# Altium PCB Led_Tree_Main .PcbDoc (part 1 of 2)
Units mm, origin at the board's own origin, x right, y up, seen from the top; angles counter-clockwise.
Board outline 150 x 150 mm, 2 copper layers (Top Layer, Bottom Layer); 89 components, 252 nets, 716 pads, 87 vias.
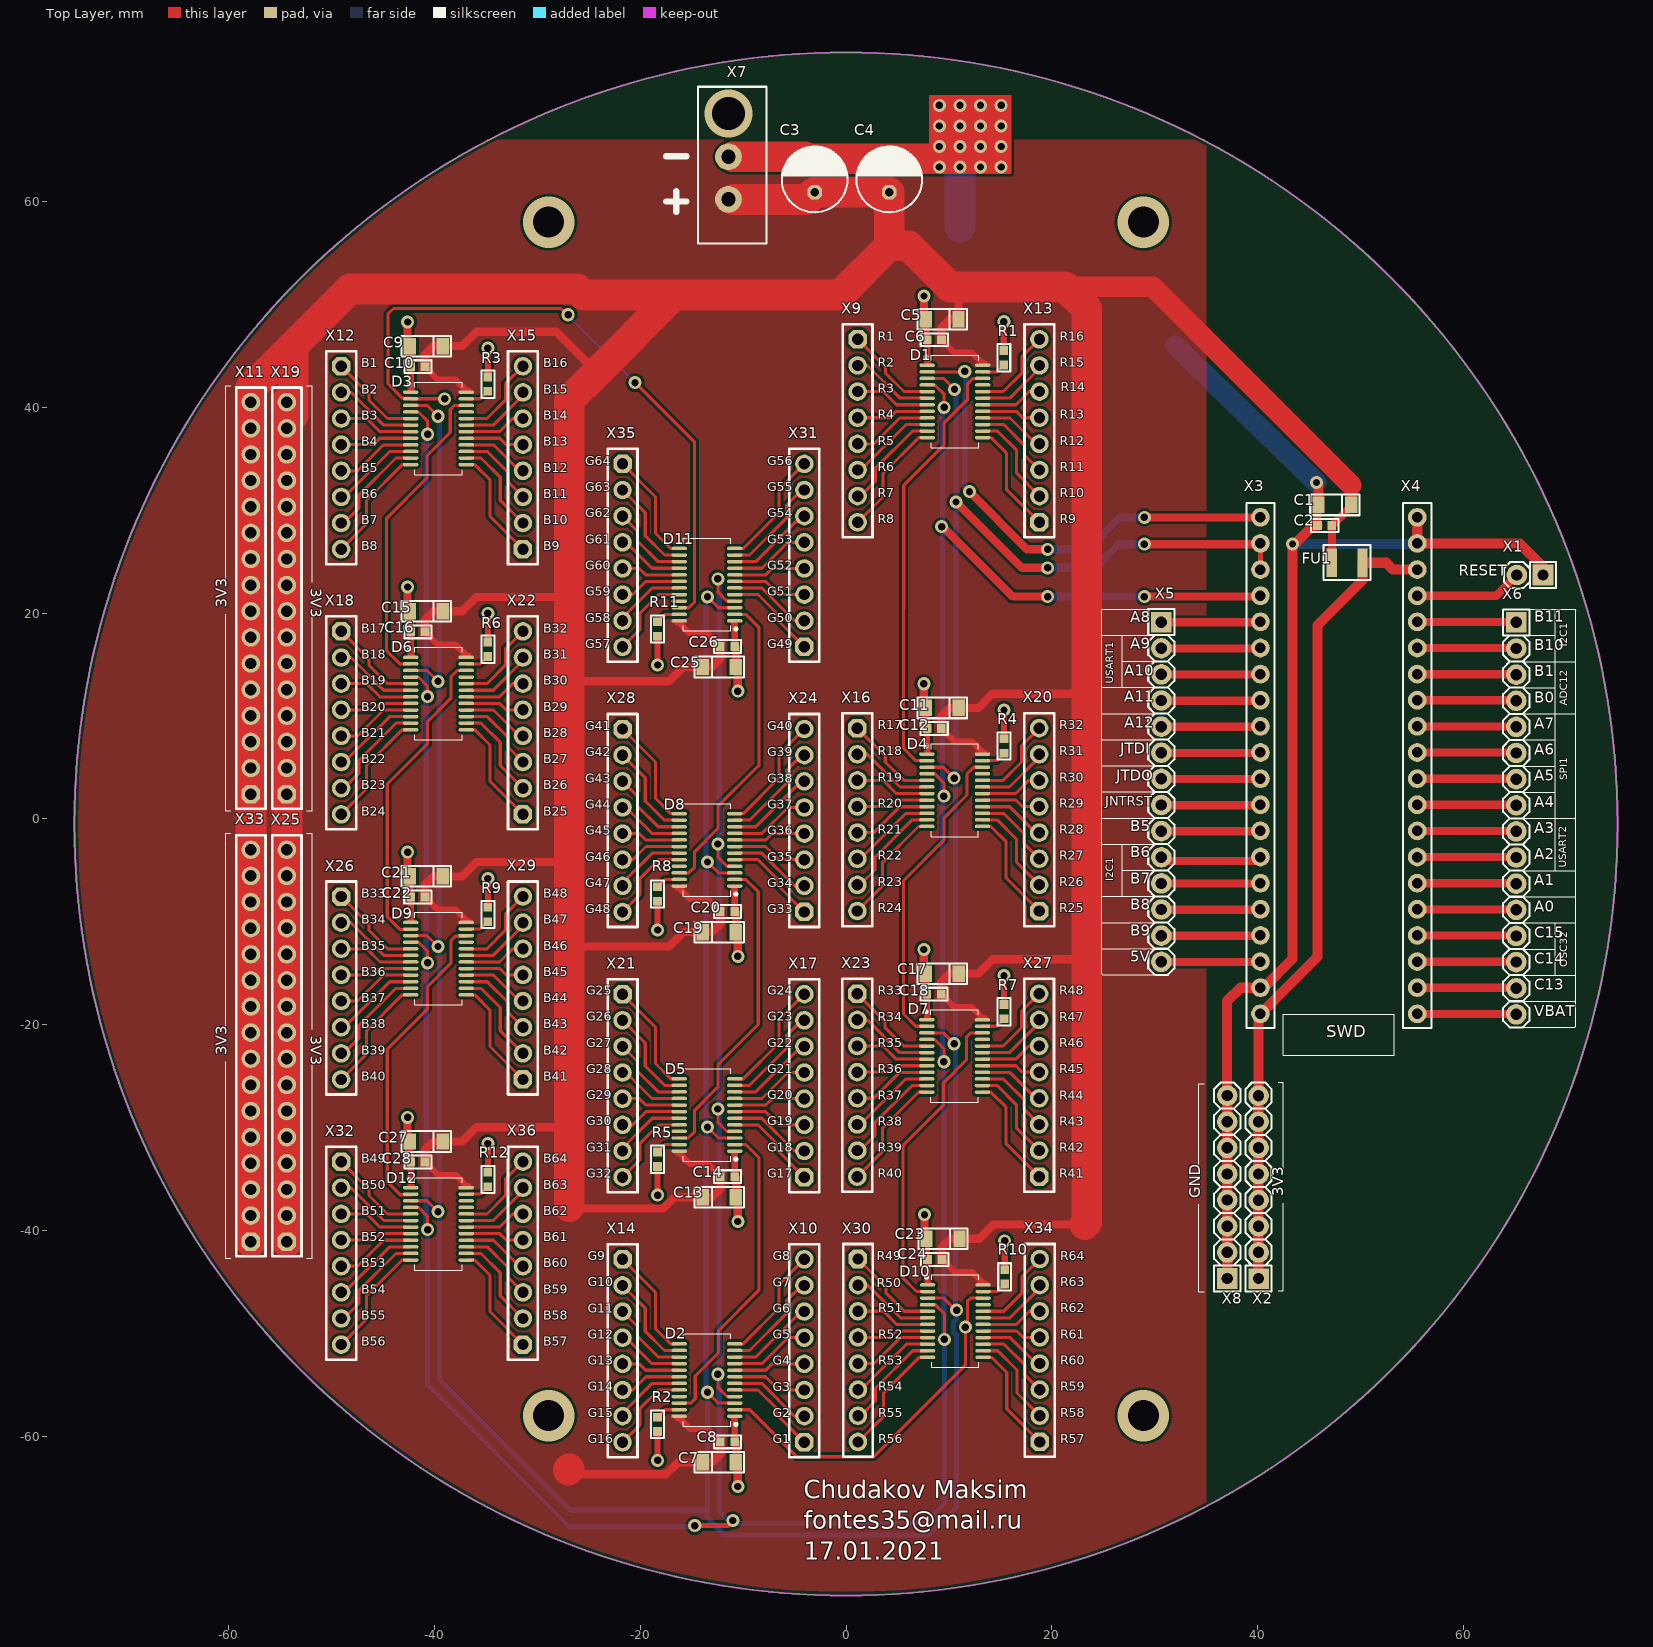
[diagram p0: Top Layer view]
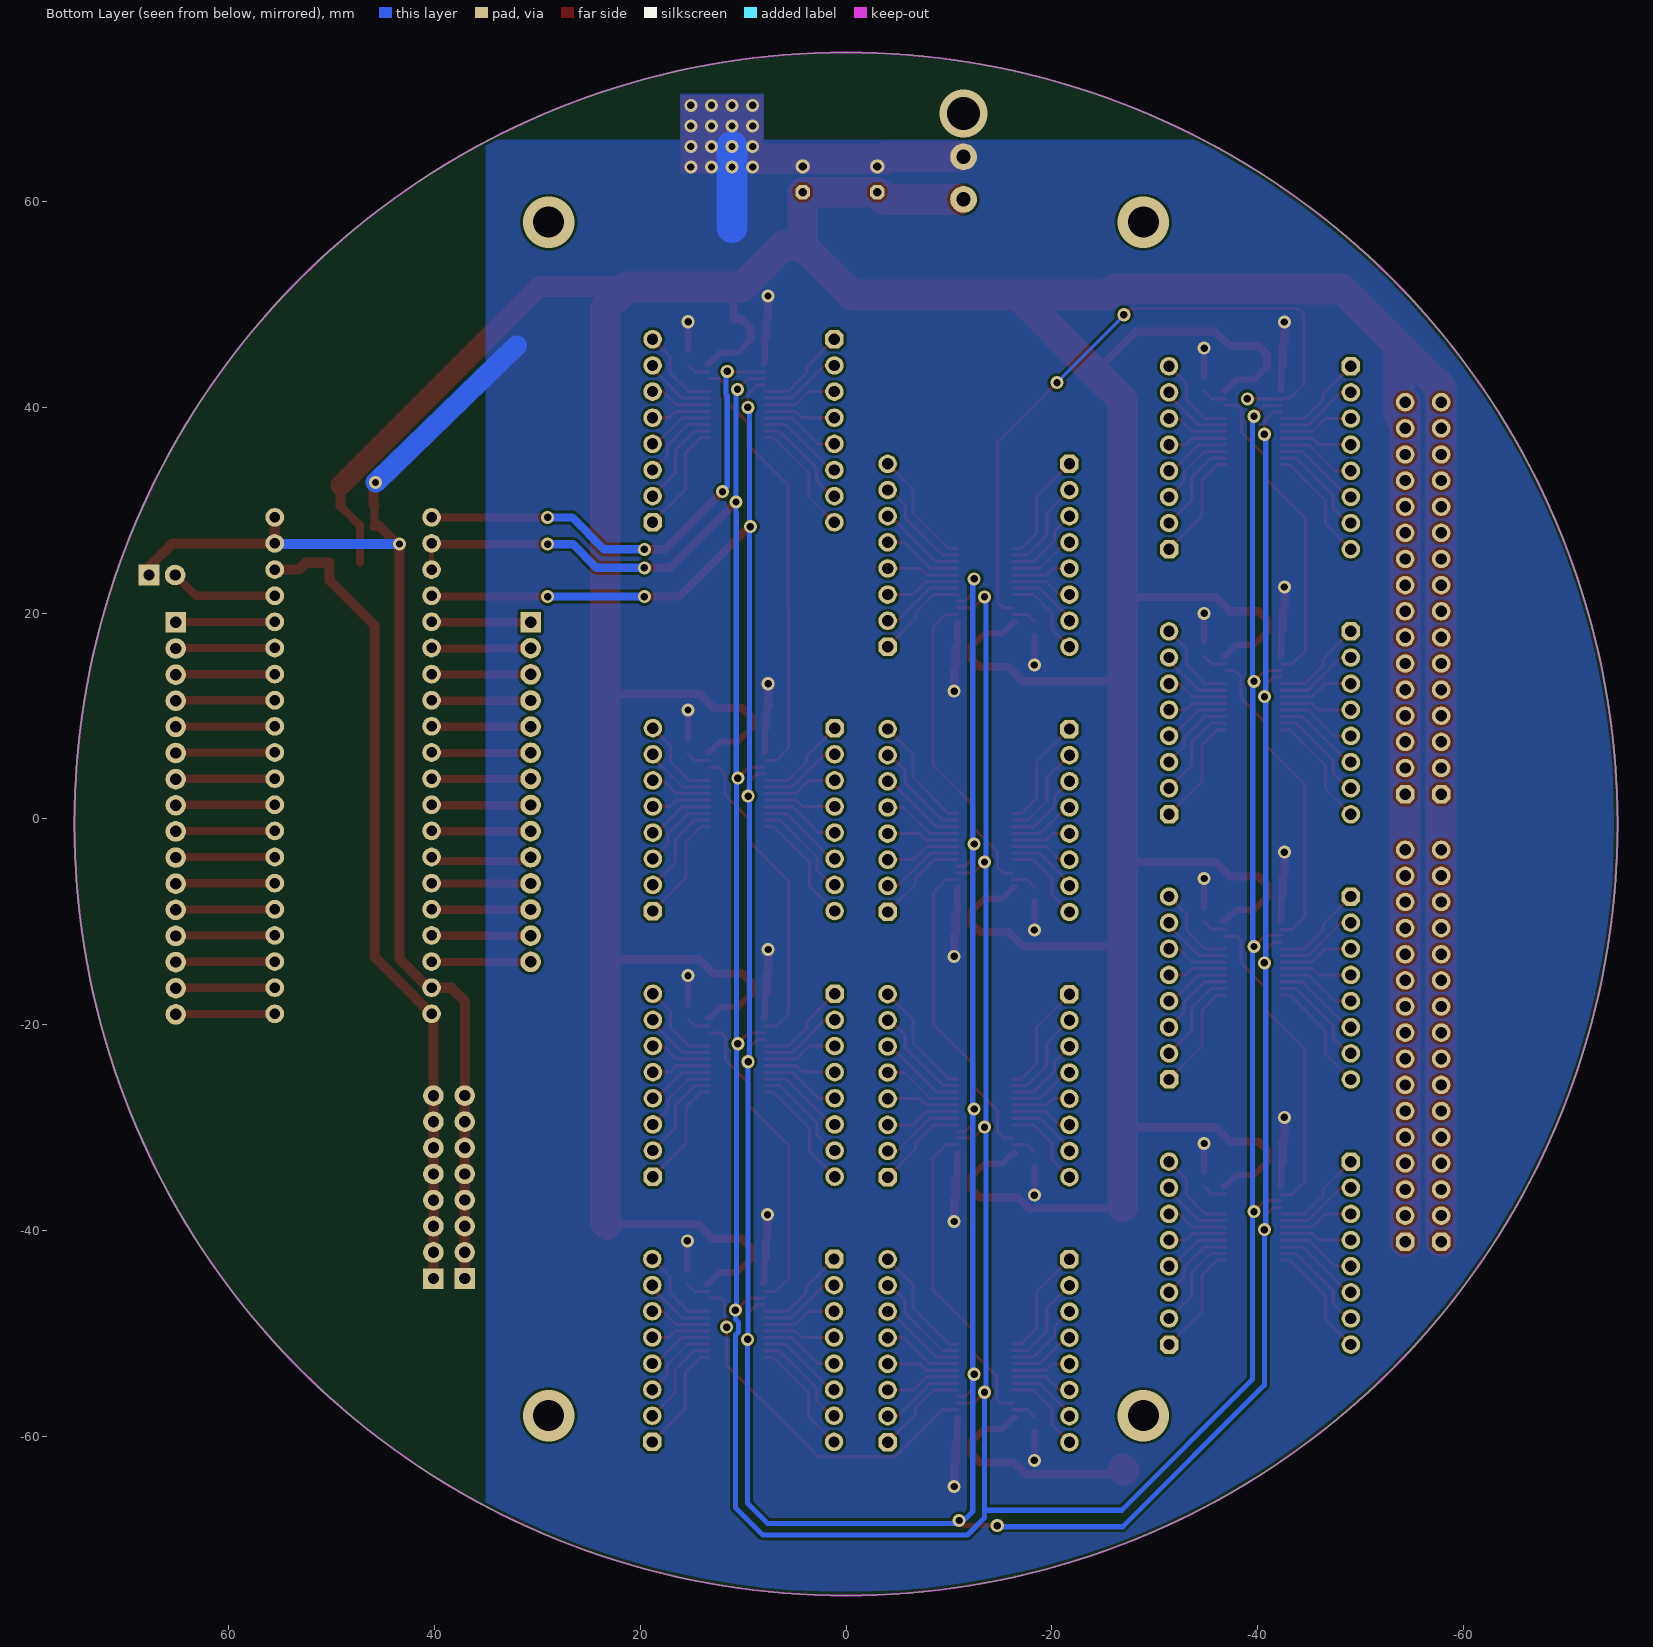
[diagram p1: Bottom Layer view, seen from below]
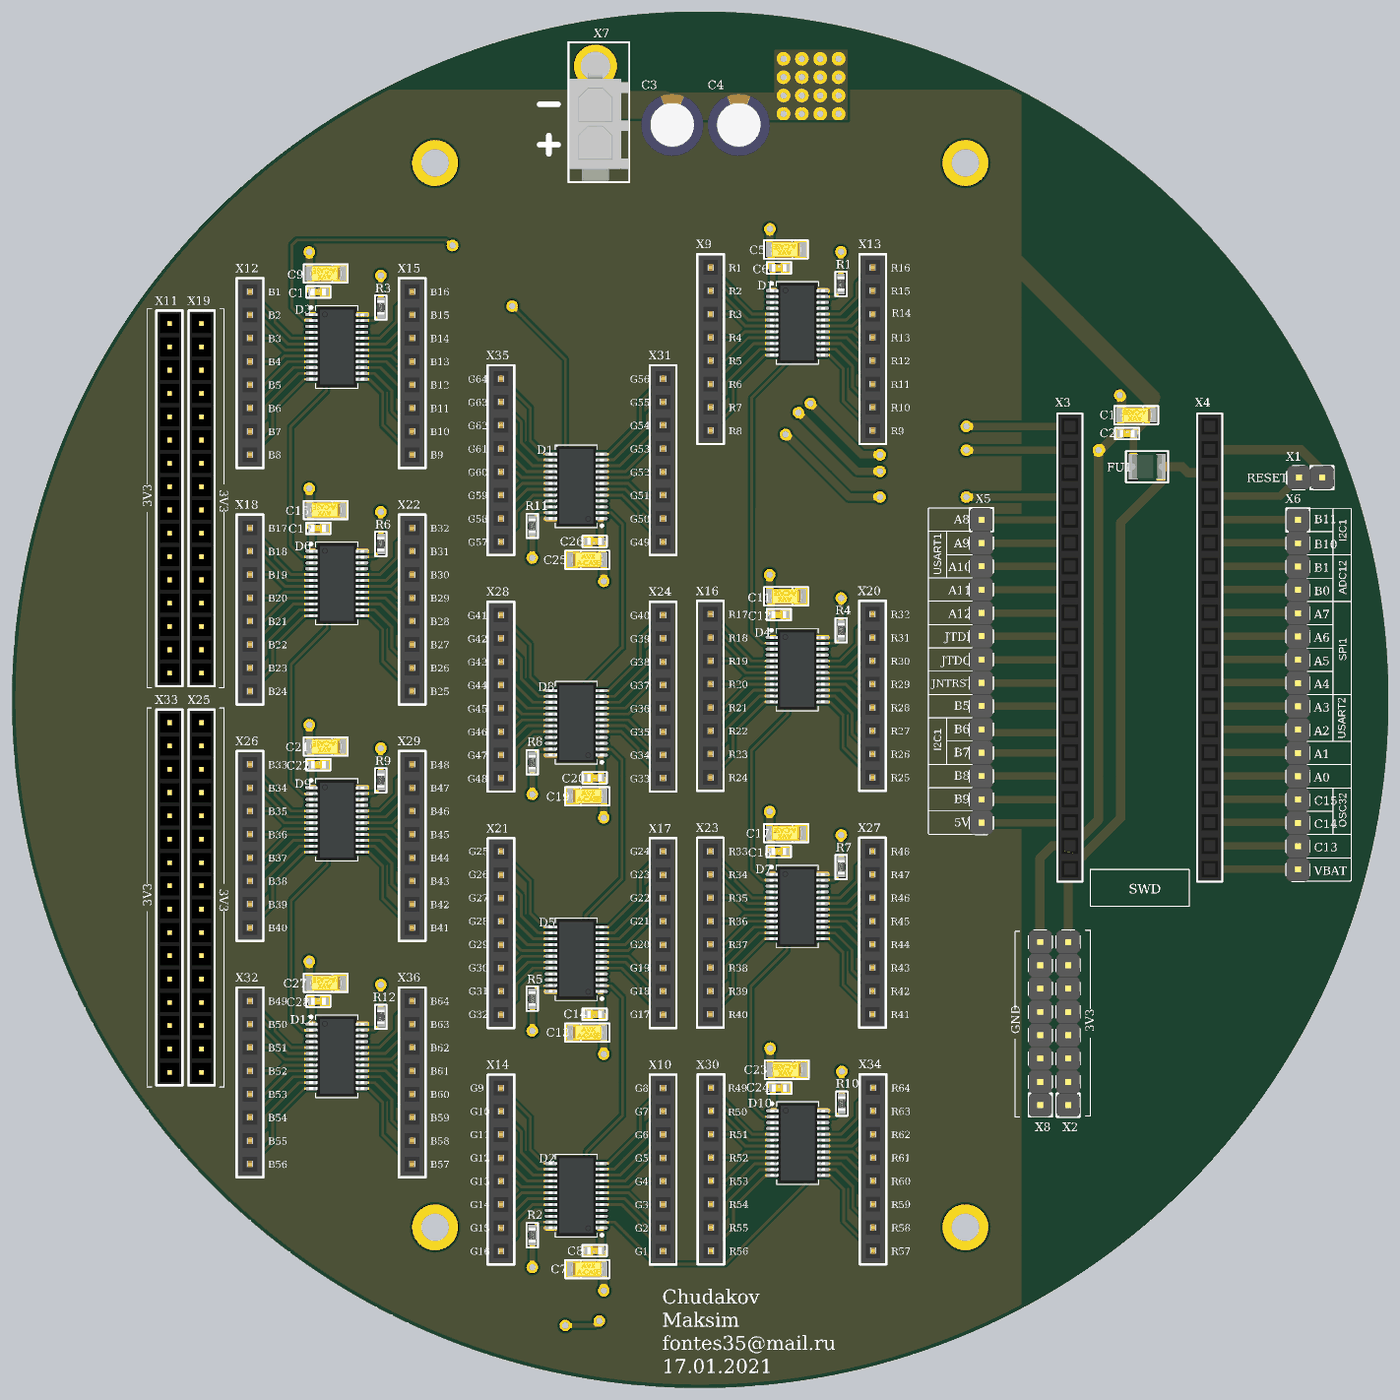
[diagram p3: 3D render of the assembled board from above, using the file's embedded part models]

## Layer stack, top to bottom
Top Solder: solder mask 0.0102, Solder Resist, Dk 3.5
Top Layer: signal copper 0.0356
Dielectric 1: dielectric 0.32, FR-4, Dk 4.8
Bottom Layer: signal copper 0.0356
Bottom Solder: solder mask 0.0102, Solder Resist, Dk 3.5

## Board outline
0,-75.5 cw(c0,-0.5) -75,-0.5 cw(c0,-0.5) 0,74.5 cw(c0,-0.5) 75,-0.5 cw(c0,-0.5)

## Design rules (kind name [scope] priority, off if disabled: settings)
Clearance [All] p1: gap=0.254 ignorepadtopadclearanceinfootprint=FALSE except(0: Arc-Hole Track-Hole SMDPad-Hole THPad-Hole Via-Hole Fill-Hole Poly-Hole Region-Hole Text-Hole)
PolygonConnect [All] p1: connectstyle=Direct reliefconductorwidth=0.8 reliefentries=4 polygonreliefangle="90 Angle" airgapwidth=0.254
RoutingVias [All] p1: holewidth=0.711 width=1.27 viastyle="Through Hole" minholewidth=0.711 minwidth=1.27 maxholewidth=0.711 maxwidth=1.27
SolderMaskExpansion [All] p1: expansion=0.102
Width [All] p1: maxlimit=10 minlimit=0.254 preferedwidth=0.254 minimp=50.000000 maximp=50.000000 favimp=50.000000
30 further rules are at their usual default settings.

## Components (designator, comment, footprint, x,y, rotation, side; value= is the part's Value field where it differs from the comment)
C1 "Tantalum capacitor, 10μF, 16V, ±10%, 3Ohm, case A (3216), -55...+125°C" "CAP: TANTAL-A" 47.525,30.51 r180 top value=10?F
C2 "Ceramic capacitor, 0.1μF, X7R, ±10%, 16V, 0603, -55...+125°C" "CAP: 0603" 46.525,28.51 r0 top value=0.1?F
C3 "Aluminium capacitor, 470μF, 10V, ±20%, , 14x10x5 mm, -40...+105°C" "CAP: D6.3C2.5H11" -3.045,62.16 r90 top value=470?F
C4 "Aluminium capacitor, 470μF, 10V, ±20%, , 14x10x5 mm, -40...+105°C" "CAP: D6.3C2.5H11" 4.205,62.16 r90 top value=470?F
C5 "Tantalum capacitor, 1μF, 35V, ±10%, 7.5Ohm, case A (3216), -55...+125°C" "CAP: TANTAL-A" 9.34,48.57 r180 top value=1?F
C6 "Ceramic capacitor, 0.01μF, X7R, ±10%, 50V, 0603, -55...+125°C" "CAP: 0603" 8.59,46.57 r0 top value=0.01?F
C7 "Tantalum capacitor, 1μF, 35V, ±10%, 7.5Ohm, case A (3216), -55...+125°C" "CAP: TANTAL-A" -12.311,-62.55 r0 top value=1?F
C8 "Ceramic capacitor, 0.01μF, X7R, ±10%, 50V, 0603, -55...+125°C" "CAP: 0603" -11.511,-60.549 r180 top value=0.01?F
C9 "Tantalum capacitor, 1μF, 35V, ±10%, 7.5Ohm, case A (3216), -55...+125°C" "CAP: TANTAL-A" -40.809,45.95 r180 top value=1?F
C10 "Ceramic capacitor, 0.01μF, X7R, ±10%, 50V, 0603, -55...+125°C" "CAP: 0603" -41.609,43.949 r0 top value=0.01?F
C11 "Tantalum capacitor, 1μF, 35V, ±10%, 7.5Ohm, case A (3216), -55...+125°C" "CAP: TANTAL-A" 9.366,10.78 r180 top value=1?F
C12 "Ceramic capacitor, 0.01μF, X7R, ±10%, 50V, 0603, -55...+125°C" "CAP: 0603" 8.566,8.78 r0 top value=0.01?F
C13 "Tantalum capacitor, 1μF, 35V, ±10%, 7.5Ohm, case A (3216), -55...+125°C" "CAP: TANTAL-A" -12.311,-36.78 r0 top value=1?F
C14 "Ceramic capacitor, 0.01μF, X7R, ±10%, 50V, 0603, -55...+125°C" "CAP: 0603" -11.511,-34.779 r180 top value=0.01?F
C15 "Tantalum capacitor, 1μF, 35V, ±10%, 7.5Ohm, case A (3216), -55...+125°C" "CAP: TANTAL-A" -40.809,20.18 r180 top value=1?F
C16 "Ceramic capacitor, 0.01μF, X7R, ±10%, 50V, 0603, -55...+125°C" "CAP: 0603" -41.609,18.179 r0 top value=0.01?F
C17 "Tantalum capacitor, 1μF, 35V, ±10%, 7.5Ohm, case A (3216), -55...+125°C" "CAP: TANTAL-A" 9.361,-15.04 r180 top value=1?F
C18 "Ceramic capacitor, 0.01μF, X7R, ±10%, 50V, 0603, -55...+125°C" "CAP: 0603" 8.56,-17.04 r0 top value=0.01?F
C19 "Tantalum capacitor, 1μF, 35V, ±10%, 7.5Ohm, case A (3216), -55...+125°C" "CAP: TANTAL-A" -12.311,-11.01 r0 top value=1?F
C20 "Ceramic capacitor, 0.01μF, X7R, ±10%, 50V, 0603, -55...+125°C" "CAP: 0603" -11.511,-9.009 r180 top value=0.01?F
C21 "Tantalum capacitor, 1μF, 35V, ±10%, 7.5Ohm, case A (3216), -55...+125°C" "CAP: TANTAL-A" -40.809,-5.59 r180 top value=1?F
C22 "Ceramic capacitor, 0.01μF, X7R, ±10%, 50V, 0603, -55...+125°C" "CAP: 0603" -41.61,-7.589 r0 top value=0.01?F
C23 "Tantalum capacitor, 1μF, 35V, ±10%, 7.5Ohm, case A (3216), -55...+125°C" "CAP: TANTAL-A" 9.426,-40.82 r180 top value=1?F
C24 "Ceramic capacitor, 0.01μF, X7R, ±10%, 50V, 0603, -55...+125°C" "CAP: 0603" 8.625,-42.82 r0 top value=0.01?F
C25 "Tantalum capacitor, 1μF, 35V, ±10%, 7.5Ohm, case A (3216), -55...+125°C" "CAP: TANTAL-A" -12.311,14.76 r0 top value=1?F
C26 "Ceramic capacitor, 0.01μF, X7R, ±10%, 50V, 0603, -55...+125°C" "CAP: 0603" -11.511,16.761 r180 top value=0.01?F
C27 "Tantalum capacitor, 1μF, 35V, ±10%, 7.5Ohm, case A (3216), -55...+125°C" "CAP: TANTAL-A" -40.809,-31.36 r180 top value=1?F
C28 "Ceramic capacitor, 0.01μF, X7R, ±10%, 50V, 0603, -55...+125°C" "CAP: 0603" -41.609,-33.361 r0 top value=0.01?F
D1 "MBI5050GP" MBI5050GP 10.59,40.57 r0 top
D2 "MBI5050GP" MBI5050GP -13.51,-54.55 r180 top
D3 "MBI5050GP" MBI5050GP -39.61,37.95 r0 top
D4 "MBI5050GP" MBI5050GP 10.565,2.78 r0 top
D5 "MBI5050GP" MBI5050GP -13.51,-28.78 r180 top
D6 "MBI5050GP" MBI5050GP -39.61,12.18 r0 top
D7 "MBI5050GP" MBI5050GP 10.56,-23.04 r0 top
D8 "MBI5050GP" MBI5050GP -13.51,-3.01 r180 top
D9 "MBI5050GP" MBI5050GP -39.61,-13.59 r0 top
D10 "MBI5050GP" MBI5050GP 10.625,-48.82 r0 top
D11 "MBI5050GP" MBI5050GP -13.51,22.76 r180 top
D12 "MBI5050GP" MBI5050GP -39.61,-39.36 r0 top
FU1 "200mA" 1210L020WR 48.7,24.9 r0 top (schematic designator FU?)
R1 "Resistor film, 75, ±1%, 0603, 0.1W, -55...+155°C" "RES: 0603" 15.34,44.82 r90 top value=75
R2 "Resistor film, 51, ±1%, 0603, 0.1W, -55...+155°C" "RES: 0603" -18.311,-58.851 r270 top value=51
R3 "Resistor film, 51, ±1%, 0603, 0.1W, -55...+155°C" "RES: 0603" -34.809,42.251 r90 top value=51
R4 "Resistor film, 75, ±1%, 0603, 0.1W, -55...+155°C" "RES: 0603" 15.366,7.081 r90 top value=75
R5 "Resistor film, 75, ±1%, 0603, 0.1W, -55...+155°C" "RES: 0603" -18.311,-33.081 r270 top value=75
R6 "Resistor film, 51, ±1%, 0603, 0.1W, -55...+155°C" "RES: 0603" -34.809,16.481 r90 top value=51
R7 "Resistor film, 75, ±1%, 0603, 0.1W, -55...+155°C" "RES: 0603" 15.361,-18.739 r90 top value=75
R8 "Resistor film, 75, ±1%, 0603, 0.1W, -55...+155°C" "RES: 0603" -18.311,-7.311 r270 top value=75
R9 "Resistor film, 51, ±1%, 0603, 0.1W, -55...+155°C" "RES: 0603" -34.809,-9.289 r90 top value=51
R10 "Resistor film, 75, ±1%, 0603, 0.1W, -55...+155°C" "RES: 0603" 15.426,-44.519 r90 top value=75
R11 "Resistor film, 75, ±1%, 0603, 0.1W, -55...+155°C" "RES: 0603" -18.311,18.459 r270 top value=75
R12 "Resistor film, 51, ±1%, 0603, 0.1W, -55...+155°C" "RES: 0603" -34.809,-35.059 r90 top value=51
X1 "Connector, 2pin, 2.54mm, 500VAC, 3A" "CON: PLS-2" 66.48,23.7 r180 top
X2 "Connector, 8pin, 2.54mm, 500VAC, 3A" "CON: PLS-8" 40.1,-35.79 r90 top
X3 "Connector, 20pin, 2.54mm, 500VAC, 3A" "CON: PBS-20" 40.285,5.18 r270 top
X4 "Connector, 20pin, 2.54mm, 500VAC, 3A" "CON: PBS-20" 55.525,5.18 r270 top
X5 "Connector, 14pin, 2.54mm, 500VAC, 3A" "CON: PLS-14" 30.65,2.615 r270 top
X6 "Connector, 16pin, 2.54mm, 500VAC, 3A" "CON: PLS-16" 65.15,0.05 r270 top
X7 "Connector, 2pin, 4.14mm, 600VAC, 9.5A" "CON: TE 1-770166-0" -11.045,62.91 r90 top
X8 "Connector, 8pin, 2.54mm, 500VAC, 3A" "CON: PLS-8" 37.06,-35.785 r90 top
X9 "Connector, 8pin, 2.54mm, 500VAC, 3A" "CON: PBS-8" 1.13,37.72 r270 top
X10 "Connector, 8pin, 2.54mm, 500VAC, 3A" "CON: PBS-8" -4.05,-51.7 r90 top
X11 "Connector, 16pin, 2.54mm, 500VAC, 3A" "CON: PBS-16" -57.85,21.45 r90 top
X12 "Connector, 8pin, 2.54mm, 500VAC, 3A" "CON: PBS-8" -49.07,35.1 r270 top
X13 "Connector, 8pin, 2.54mm, 500VAC, 3A" "CON: PBS-8" 18.8,37.72 r90 top
X14 "Connector, 8pin, 2.54mm, 500VAC, 3A" "CON: PBS-8" -21.72,-51.7 r270 top
X15 "Connector, 8pin, 2.54mm, 500VAC, 3A" "CON: PBS-8" -31.4,35.1 r90 top
X16 "Connector, 8pin, 2.54mm, 500VAC, 3A" "CON: PBS-8" 1.105,-0.07 r270 top
X17 "Connector, 8pin, 2.54mm, 500VAC, 3A" "CON: PBS-8" -4.05,-25.93 r90 top
X18 "Connector, 8pin, 2.54mm, 500VAC, 3A" "CON: PBS-8" -49.07,9.33 r270 top
X19 "Connector, 16pin, 2.54mm, 500VAC, 3A" "CON: PBS-16" -54.35,21.45 r90 top
X20 "Connector, 8pin, 2.54mm, 500VAC, 3A" "CON: PBS-8" 18.775,-0.07 r90 top
X21 "Connector, 8pin, 2.54mm, 500VAC, 3A" "CON: PBS-8" -21.72,-25.93 r270 top
X22 "Connector, 8pin, 2.54mm, 500VAC, 3A" "CON: PBS-8" -31.4,9.33 r90 top
X23 "Connector, 8pin, 2.54mm, 500VAC, 3A" "CON: PBS-8" 1.1,-25.89 r270 top
X24 "Connector, 8pin, 2.54mm, 500VAC, 3A" "CON: PBS-8" -4.05,-0.16 r90 top
X25 "Connector, 16pin, 2.54mm, 500VAC, 3A" "CON: PBS-16" -54.35,-22.05 r90 top
X26 "Connector, 8pin, 2.54mm, 500VAC, 3A" "CON: PBS-8" -49.07,-16.44 r270 top
X27 "Connector, 8pin, 2.54mm, 500VAC, 3A" "CON: PBS-8" 18.77,-25.89 r90 top
X28 "Connector, 8pin, 2.54mm, 500VAC, 3A" "CON: PBS-8" -21.72,-0.16 r270 top
X29 "Connector, 8pin, 2.54mm, 500VAC, 3A" "CON: PBS-8" -31.4,-16.44 r90 top
X30 "Connector, 8pin, 2.54mm, 500VAC, 3A" "CON: PBS-8" 1.165,-51.67 r270 top
X31 "Connector, 8pin, 2.54mm, 500VAC, 3A" "CON: PBS-8" -4.05,25.61 r90 top
X32 "Connector, 8pin, 2.54mm, 500VAC, 3A" "CON: PBS-8" -49.07,-42.21 r270 top
X33 "Connector, 16pin, 2.54mm, 500VAC, 3A" "CON: PBS-16" -57.85,-22.05 r90 top
X34 "Connector, 8pin, 2.54mm, 500VAC, 3A" "CON: PBS-8" 18.835,-51.67 r90 top
X35 "Connector, 8pin, 2.54mm, 500VAC, 3A" "CON: PBS-8" -21.72,25.61 r270 top
X36 "Connector, 8pin, 2.54mm, 500VAC, 3A" "CON: PBS-8" -31.4,-42.21 r90 top

## Footprints (in the part's own frame and the unit in brackets; to place one, negate y for a bottom-side part, rotate by r counter-clockwise, add the part's x,y. Pads: shape width x height; smd on the part's side, far side on the other; paste and mask are expansions set on the pad)
1210L020WR [mm]
  rect 1x2.8 smd: 1(-1.5,0) 2(1.5,0)
  silkscreen extent -2.3,-1.7 2.3,1.7, body extent -1.61,-1.29 1.61,1.29, height 0.67
"CAP: 0603" [mm]
  rect 0.85x0.85 smd: 1(-0.7,0) 2(0.7,0)
  silkscreen extent -1.33,-0.63 1.33,0.63, body extent -0.8,-0.4 0.8,0.4, height 0.3
"CAP: D6.3C2.5H11" [mm]
  oct 1.4x1.4 hole 0.8: 1(-1.25,0)
  round 1.4 hole 0.8: 2(1.25,0)
  silkscreen extent -3.2,-3.2 3.2,3.2, body extent -3.4,-3.4 3.4,3.4, height 12.5
"CAP: TANTAL-A" [mm]
  rect 1.2x1.6 smd: 1(-1.6,0) 2(1.6,0)
  silkscreen extent -2.4,-1 2.4,1, body extent -1.7,-0.84 1.7,0.84, height 1.71
"CON: PBS-8" [mm] "PBS-8"
  oct 1.8x1.8 hole 1.1: 1(-8.89,0)
  round 1.8 hole 1.1: 2(-6.35,0) 3(-3.81,0) 4(-1.27,0) 5(1.27,0) 6(3.81,0) 7(6.35,0) 8(8.89,0)
  silkscreen extent -10.35,-1.45 10.35,1.45, body extent -10.16,-1.27 10.16,1.27, height 8.4
"CON: PBS-16" [mm] "PBS-16"
  oct 1.8x1.8 hole 1.1: 1(-19.05,0)
  round 1.8 hole 1.1: 2(-16.51,0) 3(-13.97,0) 4(-11.43,0) 5(-8.89,0) 6(-6.35,0) 7(-3.81,0) 8(-1.27,0) 9(1.27,0) 10(3.81,0) 11(6.35,0) 12(8.89,0) 13(11.43,0) 14(13.97,0) 15(16.51,0) 16(19.05,0)
  silkscreen extent -20.48,-1.43 20.48,1.43, body extent -20.32,-1.27 20.32,1.27, height 8.27
"CON: PBS-20" [mm]
  round 1.82 hole 1.02: 1(-24.13,0) 2(-21.59,0) 3(-19.05,0) 4(-16.51,0) 5(-13.97,0) 6(-11.43,0) 7(-8.89,0) 8(-6.35,0) 9(-3.81,0) 10(-1.27,0) 11(1.27,0) 12(3.81,0) 13(6.35,0) 14(8.89,0) 15(11.43,0) 16(13.97,0) 17(16.51,0) 18(19.05,0) 19(21.59,0) 20(24.13,0)
  silkscreen extent -25.5,-1.37 25.5,1.37, body extent -25.4,-1.27 25.4,1.27, height 8.5
"CON: PLS-2" [mm]
  rect 2x2 hole 1.1: 1(-1.27,0)
  round 2 hole 1.1: 2(1.27,0)
  silkscreen extent -2.54,-1.27 2.54,1.27, body extent -2.57,-1.28 2.51,1.26, height 8.54
"CON: PLS-8" [mm] "PLS-40 8 pin header"
  rect 2x2 hole 1.1: 1(-8.89,0)
  round 2 hole 1.1: 2(-6.35,0) 3(-3.81,0) 4(-1.27,0) 5(1.27,0) 6(3.81,0) 7(6.35,0) 8(8.89,0)
  silkscreen extent -10.16,-1.27 10.16,1.27, body extent -10.16,-1.27 10.16,1.27, height 8.54
"CON: PLS-14" [mm]
  rect 2x2 hole 1.1: 1(-16.51,0)
  round 2 hole 1.1: 2(-13.97,0) 3(-11.43,0) 4(-8.89,0) 5(-6.35,0) 6(-3.81,0) 7(-1.27,0) 8(1.27,0) 9(3.81,0) 10(6.35,0) 11(8.89,0) 12(11.43,0) 13(13.97,0) 14(16.51,0)
  silkscreen extent -17.78,-1.27 17.78,1.27, body extent -17.78,-1.27 17.78,1.27, height 8.54
"CON: PLS-16" [mm]
  rect 2x2 hole 1.1: 1(-19.05,0)
  round 2 hole 1.1: 2(-16.51,0) 3(-13.97,0) 4(-11.43,0) 5(-8.89,0) 6(-6.35,0) 7(-3.81,0) 8(-1.27,0) 9(1.27,0) 10(3.81,0) 11(6.35,0) 12(8.89,0) 13(11.43,0) 14(13.97,0) 15(16.51,0) 16(19.05,0)
  silkscreen extent -20.32,-1.27 20.32,1.27, body extent -20.32,-1.27 20.32,1.27, height 8.54
"CON: TE 1-770166-0" [mm]
  round 2.6 hole 1.4: 1(-2.7,0.38) 2(1.44,0.38)
  silkscreen extent -7,-3.32 8.25,3.32, body extent -6.85,-3.18 6.84,3.17, height 14.25
MBI5050GP [mm]
  oval 1.5x0.34 smd: 1(-2.7,3.52) 2(-2.7,2.88) 3(-2.7,2.24) 4(-2.7,1.6) 5(-2.7,0.96) 6(-2.7,0.32) 7(-2.7,-0.32) 8(-2.7,-0.96) 9(-2.7,-1.6) 10(-2.7,-2.24) 11(-2.7,-2.88) 12(-2.7,-3.52) 13(2.7,-3.52) 14(2.7,-2.88) 15(2.7,-2.24) 16(2.7,-1.6) 17(2.7,-0.96) 18(2.7,-0.32) 19(2.7,0.32) 20(2.7,0.96) 21(2.7,1.6) 22(2.7,2.24) 23(2.7,2.88) 24(2.7,3.52)
  silkscreen extent -2.92,-4.5 2.3,4.5, body extent -3,-4.35 3,4.35, height 1.7
"RES: 0603" [mm]
  rect 0.85x0.85 smd: 1(-0.7,0) 2(0.7,0)
  silkscreen extent -1.33,-0.63 1.33,0.63, body extent -0.8,-0.4 0.8,0.4, height 0.44

## Part data
C1: library part Tantal_A, Manufacturer=AVX, Package="case A (3216)", PartNumber=TAJA106K016RNJ, Temperature=-55...+125°C, Tolerance=±10%, TypeCapacitor="Tantalum capacitor", ValueManufacturerPartNumber="Tantalum capacitor, 10?F, 16V, ±10%, 3Ohm, case A (3216), -55...+125°C", Voltage=16V, HelpURL=https://www.digikey.com/product-detail/en/avx-corporation/TAJA106K016RNJ/478-1655-1-ND/564687, Impedance=3Ohm
C2: library part Ceramic_0603, Manufacturer="Murata Electronics", Package=0603, PartNumber=GRM188R71C104KA01D, Temperature=-55...+125°C, Tolerance=±10%, TypeCapacitor="Ceramic capacitor", TypeDielectric=X7R, ValueManufacturerPartNumber="Ceramic capacitor, 0.1?F, X7R, ±10%, 16V, 0603, -55...+125°C", Voltage=16V, HelpURL=https://www.digikey.com/product-detail/en/murata-electronics/GRM188R71C104KA01D/490-1532-2-ND/587060
C3 C4: library part Aluminium, Manufacturer=JB, Package="14x10x5 mm", PartNumber=JRB1A471M02500630120000B, Temperature=-40...+105°C, Tolerance=±20%, TypeCapacitor="Aluminium capacitor", ValueManufacturerPartNumber="Aluminium capacitor, 470?F, 10V, ±20%, , 14x10x5 mm, -40...+105°C", Voltage=10V, HelpURL=https://www.digikey.com/product-detail/en/wurth-electronics-inc/860080475013/732-9029-1-ND/5728972
C5 C7 C9 C11 C13 C15 C17 C19 C21 C23 C25 C27: library part Tantal_A, Manufacturer=AVX, Package="case A (3216)", PartNumber=TAJA105K035RNJ, Temperature=-55...+125°C, Tolerance=±10%, TypeCapacitor="Tantalum capacitor", ValueManufacturerPartNumber="Tantalum capacitor, 1?F, 35V, ±10%, 7.5Ohm, case A (3216), -55...+125°C", Voltage=35V, HelpURL=https://www.digikey.com/product-detail/en/avx-corporation/TAJA105K035RNJ/478-1651-2-ND/563759, Impedance=7.5Ohm
C6 C8 C10 C12 C14 C16 C18 C20 C22 C24 C26 C28: library part Ceramic_0603, Manufacturer="Murata Electronics", Package=0603, PartNumber=GRM188R71H103KA01D, Temperature=-55...+125°C, Tolerance=±10%, TypeCapacitor="Ceramic capacitor", TypeDielectric=X7R, ValueManufacturerPartNumber="Ceramic capacitor, 0.01?F, X7R, ±10%, 50V, 0603, -55...+125°C", Voltage=50V, HelpURL=https://www.digikey.com/product-detail/en/murata-electronics/GRM188R71H103KA01D/490-1512-2-ND/587151
D1 D2 D3 D4 D5 D6 D7 D8 D9 D10 D11 D12: "16ch PWM LED Driver", Case=SSOP24L-150-0.64, Manufacture=Macroblock, HelpURL=https://www.electronshik.ru/item/MBI/MBI5050GP, Model=MBI5050GP
FU1: library part 1210L020WR, Case=1210, Manufacture=Littlefuse, HelpURL=https://www.electronshik.ru/item/LTL/1210L020WR, Model=1210L020WR
R1 R4 R5 R7 R8 R10 R11: library part Resistor_0603, Manufacturer=Yageo, Package=0603, PartNumber=RC0603FR-0775RL, Power=0.1W, Temperature=-55...+155°C, Tolerance=±1%, TypeResistor="Resistor film", HelpURL=https://www.digikey.com/en/products/detail/yageo/RC0603FR-0775RL/727377?s=N4IgTCBcDaIEoGEAMA2JBmAYnAtEg7PgKxwAyIAugL5A, ValueManufacturerPartNumber="Resistor film, 75, ±1%, 0603, 0.1W, -55...+155°C"
R2 R3 R6 R9 R12: library part Resistor_0603, Manufacturer=Yageo, Package=0603, PartNumber=RC0603FR-0751RL, Power=0.1W, Temperature=-55...+155°C, Tolerance=±1%, TypeResistor="Resistor film", ValueManufacturerPartNumber="Resistor film, 51, ±1%, 0603, 0.1W, -55...+155°C"
  R2 R3: HelpURL=https://www.digikey.com/en/products/detail/yageo/RC0603FR-0751RL/727281?s=N4IgTCBcDaIEoGEAMA2JBmAYnAtEg7AKwCMcAMiALoC%2BQA
  R6 R9 R12: HelpURL=https://www.digikey.com/en/products/detail/yageo/RC0603FR-0775RL/727377?s=N4IgTCBcDaIEoGEAMA2JBmAYnAtEg7PgKxwAyIAugL5A
X1: library part PLS-2, CurrentMax=3A, Manufacturer=Connfly, VoltageMax=500VAC, CommentText="\"Ðàçúåì\"", HelpURL=https://www.chipdip.ru/product/pls-2, Multichannel=2pin, PartNumber=PLS-2, Pitch=2.54mm, TypeConnector=Connector, ValueManufacturerPartNumber="Connector, 2pin, 2.54mm, 500VAC, 3A"
X2 X8: library part PLS-8, CurrentMax=3A, Manufacturer=Connfly, VoltageMax=500VAC, CommentText="\"Ðàçúåì\"", HelpURL=https://www.chipdip.ru/product/pls-8-ds1021-1-8sf112, Multichannel=8pin, PartNumber=PLS-8, Pitch=2.54mm, TypeConnector=Connector, ValueManufacturerPartNumber="Connector, 8pin, 2.54mm, 500VAC, 3A"
X3 X4: library part PBS-20, CurrentMax=3A, Manufacturer=Connfly, VoltageMax=500VAC, CommentText="\"Ðàçúåì\"", HelpURL=https://www.chipdip.ru/product/pbs20, Multichannel=20pin, PartNumber=PBS-20, Pitch=2.54mm, TypeConnector=Connector, ValueManufacturerPartNumber="Connector, 20pin, 2.54mm, 500VAC, 3A"
X5: library part PLS-14, CurrentMax=3A, Manufacturer=Connfly, VoltageMax=500VAC, CommentText="\"Ðàçúåì\"", HelpURL=https://www.chipdip.ru/product/pls-14, Multichannel=14pin, PartNumber=PLS-14, Pitch=2.54mm, TypeConnector=Connector, ValueManufacturerPartNumber="Connector, 14pin, 2.54mm, 500VAC, 3A"
X6: library part PLS-16, CurrentMax=3A, Manufacturer=Connfly, VoltageMax=500VAC, CommentText="\"Ðàçúåì\"", HelpURL=https://www.chipdip.ru/product/pls-16, Multichannel=16pin, PartNumber=PLS-16, Pitch=2.54mm, TypeConnector=Connector, ValueManufacturerPartNumber="Connector, 16pin, 2.54mm, 500VAC, 3A"
X7: library part "TE 1-770166-0", "Power plug, to board, 2 pins", CurrentMax=9.5A, Manufacturer="TE Connectivity", PartNumber=1-770166-0, VoltageMax=600VAC, CommentText="\"Ðàçúåì\"", HelpURL=https://www.chipdip.ru/product1/8001994596?from=suggest_product, Multichannel=2pin, Pitch=4.14mm, TypeConnector=Connector, ValueManufacturerPartNumber="Connector, 2pin, 4.14mm, 600VAC, 9.5A"
X9 X10 X12 X13 X14 X15 X16 X17 X18 X20 X21 X22 X23 X24 X26 X27 X28 X29 X30 X31 X32 X34 X35 X36: library part PBS-8, CurrentMax=3A, Manufacturer=Connfly, VoltageMax=500VAC, CommentText="\"Ðàçúåì\"", HelpURL=https://www.chipdip.ru/product/pbs-8, Multichannel=8pin, PartNumber=PBS-8, Pitch=2.54mm, TypeConnector=Connector, ValueManufacturerPartNumber="Connector, 8pin, 2.54mm, 500VAC, 3A"
X11 X19 X25 X33: library part PBS-16, CurrentMax=3A, Manufacturer=Connfly, VoltageMax=500VAC, CommentText="\"Ðàçúåì\"", HelpURL=https://www.chipdip.ru/product/pbs16, Multichannel=16pin, PartNumber=PBS-16, Pitch=2.54mm, TypeConnector=Connector, ValueManufacturerPartNumber="Connector, 16pin, 2.54mm, 500VAC, 3A"

## Via types
v1: diameter 1.27, hole 0.711, Top Layer to Bottom Layer, 82 vias
v2: diameter 5, hole 3, Top Layer to Bottom Layer, 4 vias
v3: diameter 4.68, hole 3.18, Top Layer to Bottom Layer, 1 vias

## Nets (pads, with @x,y where several pads share a name; then routed paths per layer and width w, separated by ;. In a path a pad name is that pad's centre, name@x,y a point inside that pad or via, vN(x,y) a via of type N, cw(c..) or ccw(c..) an arc to the next point about the centre after c; other vN are vias at no path point)
GND: C1.2 C2.1 C3.2 C4.2 C5.2 C6.1 C7.2 C8.1 C9.2 C10.1 C11.2 C12.1 C13.2 C14.1 C15.2 C16.1 C17.2 C18.1 C19.2 C20.1 C21.2 C22.1 C23.2 C24.1 C25.2 C26.1 C27.2 C28.1 D1.1 D2.1 D3.1 D4.1 D5.1 D6.1 D7.1 D8.1 D9.1 D10.1 D11.1 D12.1 R1.2 R2.2 R3.2 R4.2 R5.2 R6.2 R7.2 R8.2 R9.2 R10.2 R11.2 R12.2 X1.1 X3.19 X4.1 X4.2 X7.2 X8.1 X8.2 X8.3 X8.4 X8.5 X8.6 X8.7 X8.8 | length 271.4
  Top Layer w0.6: C28.1@-42.309,-33.361 -42.31,-35.58 D12.1@-42.2,-35.69 ; C22.1@-42.31,-7.589 -42.31,-9.81 D9.1@-42.2,-9.92 ; C16.1@-42.31,18.18 -42.31,15.96 D6.1@-42.2,15.85 ; C10.1@-42.309,43.949 -42.31,41.73 D3.1@-42.2,41.62 ; R12.2@-34.809,-34.359 v1(-34.809,-31.56) ; R9.2@-34.809,-8.59 v1(-34.809,-5.79) ; R6.2@-34.809,17.181 v1(-34.809,19.98) ; R3.2@-34.809,42.951 v1(-34.809,45.75) ; v1(-18.311,-62.35) R2.2@-18.311,-59.551 ; v1(-18.311,-36.58) R5.2@-18.311,-33.781 ; v1(-18.311,-10.81) R8.2@-18.311,-8.011 ; v1(-18.311,14.96) R11.2@-18.311,17.759 ; D2.1@-10.92,-58.22 -10.81,-58.33 C8.1@-10.811,-60.549 ; D5.1@-10.92,-32.45 -10.81,-32.56 C14.1@-10.81,-34.78 ; D8.1@-10.92,-6.68 -10.81,-6.79 C20.1@-10.811,-9.009 ; D11.1@-10.92,19.09 -10.81,18.98 C26.1@-10.811,16.761 ; C18.1@7.86,-17.04 7.86,-19.26 D7.1@7.97,-19.37 ; C12.1@7.866,8.78 7.865,6.56 D4.1@7.975,6.45 ; C6.1@7.89,46.57 7.89,44.35 D1.1@8,44.24 ; C24.1@7.925,-42.82 7.925,-45.04 D10.1@8.035,-45.15 ; R1.2@15.34,45.52 v1(15.34,48.32) ; R7.2@15.361,-18.039 v1(15.361,-15.24) ; R4.2@15.366,7.781 v1(15.366,10.58) ; R10.2@15.426,-43.819 v1(15.426,-41.02)
  Top Layer w0.8: C27.2@-42.609,-31.209 v1(-42.609,-29.01) ; C21.2@-42.609,-5.439 v1(-42.609,-3.24) ; C15.2@-42.609,20.331 v1(-42.609,22.53) ; C9.2@-42.609,46.101 v1(-42.609,48.3) ; C28.1@-42.46,-33.21 C27.2@-42.46,-31.36 ; C22.1@-42.46,-7.44 C21.2@-42.46,-5.59 ; C16.1@-42.46,18.33 C15.2@-42.46,20.18 ; C10.1@-42.46,44.1 C9.2@-42.46,45.95 ; C7.2@-10.66,-62.55 C8.1@-10.66,-60.7 ; C13.2@-10.66,-36.78 C14.1@-10.66,-34.93 ; C19.2@-10.66,-11.01 C20.1@-10.66,-9.16 ; C25.2@-10.66,14.76 C26.1@-10.66,16.61 ; v1(-10.511,-64.9) C7.2@-10.511,-62.701 ; v1(-10.511,-39.13) C13.2@-10.511,-36.931 ; v1(-10.511,-13.36) C19.2@-10.511,-11.161 ; v1(-10.511,12.41) C25.2@-10.511,14.609 ; C17.2@7.561,-14.889 v1(7.561,-12.69) ; C11.2@7.565,10.93 7.566,10.931 v1(7.566,13.13) ; v1(7.59,50.82) 7.59,48.72 C5.2@7.74,48.57 7.74,46.72 C6.1@7.89,46.57 ; C23.2@7.626,-40.669 v1(7.626,-38.47) ; C18.1@7.71,-16.89 C17.2@7.71,-15.04 ; C12.1@7.715,8.93 C11.2@7.715,10.78 ; C24.1@7.775,-42.67 C23.2@7.775,-40.82 ; X3.19@40.285,-16.41 X3.19@40.59,-16.41 ; C2.1@45.825,28.51 C1.2@45.825,30.41 ; X4.2@55.465,26.71 X4.2@55.525,26.77
  Top Layer w1: X8.1@37.06,-44.675 X8.2@37.06,-42.135 X8.3@37.06,-39.595 X8.4@37.06,-37.055 X8.5@37.06,-34.515 X8.6@37.06,-31.975 X8.7@37.06,-29.435 X8.8@37.06,-27.025 ; X8.8@37.06,-26.895 X8.8@37.06,-27.025 ; X3.19@40.285,-16.41 38.355,-16.41 37.025,-17.74 37.025,-26.99 X8.8@37.06,-27.025 ; X3.19@40.59,-16.41 43.4,-13.6 v1@43.4,26.5 ; v1(43.4,26.71) v1@43.4,26.5 ; v1(45.725,32.7) 45.925,32.5 C1.2@45.925,30.51 C1.2@45.825,30.41 ; C2.1@45.825,28.51 45.807,28.492 45.392,28.492 v1@43.4,26.5 ; X4.2@55.525,26.76 65.49,26.76 67.75,24.5 X1.1@67.75,23.7 ; X4.2@55.525,26.77 X4.1@55.525,29.31
  Top Layer w3: X7.2@-10.972,64.35 -3.985,64.35 -3.799,64.164 9.075,64.164 10.461,64.164
  Bottom Layer w0.8: v1@15.301,-15.18 v1(15.361,-15.24) ; v1@15.325,10.621 v1(15.366,10.58)
  Bottom Layer w1: v1(43.4,26.71) X4.2@55.525,26.71
  Bottom Layer w2: 32,46 v1(45.725,32.7)
  Bottom Layer w3: 11.075,57.495 v1(11.075,63.35) v1(11.075,65.35)
  other v1: 9.075,63.35 13.075,63.35 15.075,63.35 9.075,65.35 13.075,65.35 15.075,65.35 9.075,67.35 11.075,67.35 13.075,67.35 15.075,67.35 9.075,69.35 11.075,69.35 13.075,69.35 15.075,69.35
NetC1_1: C1.1 C2.2 C3.1 C4.1 C5.1 C6.2 C7.1 C8.2 C9.1 C10.2 C11.1 C12.2 C13.1 C14.2 C15.1 C16.2 C17.1 C18.2 C19.1 C20.2 C21.1 C22.2 C23.1 C24.2 C25.1 C26.2 C27.1 C28.2 D1.24 D2.24 D3.24 D4.24 D5.24 D6.24 D7.24 D8.24 D9.24 D10.24 D11.24 D12.24 FU1.1 X7.1 X11.1 X11.2 X11.3 X11.4 X11.5 X11.6 X11.7 X11.8 X11.9 X11.10 X11.11 X11.12 X11.13 X11.14 X11.15 X11.16 X19.1 X19.2 X19.3 X19.4 X19.5 X19.6 X19.7 X19.8 X19.9 X19.10 X19.11 X19.12 X19.13 X19.14 X19.15 X19.16 X25.1 X25.2 X25.3 X25.4 X25.5 X25.6 X25.7 X25.8 X25.9 X25.10 X25.11 X25.12 X25.13 X25.14 X25.15 X25.16 X33.1 X33.2 X33.3 X33.4 X33.5 X33.6 X33.7 X33.8 X33.9 X33.10 X33.11 X33.12 X33.13 X33.14 X33.15 X33.16 | length 765.1
  Top Layer w0.6: C28.2@-40.909,-33.361 -39.66,-34.61 -37.956,-34.61 -36.876,-35.69 D12.24@-36.7,-35.69 ; C22.2@-40.91,-7.589 -39.66,-8.84 -37.956,-8.84 -36.876,-9.92 D9.24@-36.7,-9.92 ; C16.2@-40.909,18.179 -39.66,16.93 -37.956,16.93 -36.876,15.85 D6.24@-36.7,15.85 ; C10.2@-40.909,43.949 -39.66,42.7 -37.956,42.7 -36.876,41.62 D3.24@-36.7,41.62 ; D2.24@-16.42,-58.22 -16.244,-58.22 -15.164,-59.3 -13.46,-59.3 C8.2@-12.211,-60.549 ; D5.24@-16.42,-32.45 -16.244,-32.45 -15.164,-33.53 -13.46,-33.53 C14.2@-12.211,-34.779 ; D8.24@-16.42,-6.68 -16.244,-6.68 -15.164,-7.76 -13.46,-7.76 C20.2@-12.211,-9.009 ; D11.24@-16.42,19.09 -16.244,19.09 -15.164,18.01 -13.46,18.01 C26.2@-12.211,16.761 ; C18.2@9.26,-17.04 10.51,-18.29 12.214,-18.29 13.294,-19.37 D7.24@13.47,-19.37 ; C12.2@9.266,8.78 9.266,8.779 10.515,7.53 12.219,7.53 13.299,6.45 D4.24@13.475,6.45 ; C6.2@9.291,46.568 10.54,45.319 12.244,45.319 13.324,44.239 D1.24@13.5,44.239 ; C24.2@9.326,-42.821 10.575,-44.07 12.279,-44.07 13.359,-45.15 D10.24@13.535,-45.15
  Top Layer w0.8: C28.2@-40.91,-33.359 -40.91,-32.16 -40.11,-31.36 C27.1@-39.209,-31.36 -37.31,-31.36 -35.92,-29.97 -26.9,-29.97 -26.22,-29.97 ; C22.2@-40.91,-7.589 -40.91,-6.39 -40.11,-5.59 C21.1@-39.209,-5.59 -37.31,-5.59 -35.92,-4.2 -26.9,-4.2 -26.22,-4.2 ; C16.2@-40.91,18.181 -40.91,19.38 -40.11,20.18 C15.1@-39.209,20.18 -37.31,20.18 -35.92,21.57 -26.9,21.57 -26.22,21.57 ; C10.2@-40.91,43.951 -40.91,45.15 -40.11,45.95 C9.1@-39.209,45.95 -37.31,45.95 -35.92,47.34 -28.14,47.34 -24.2,43.4 -23.9,43.1 ; -27,-63.3 -26.6,-63.7 -17.5,-63.7 -16.35,-62.55 C7.1@-13.911,-62.55 -13.01,-62.55 -12.21,-61.75 C8.2@-12.21,-60.551 ; -26.9,-37.7 -26.731,-37.869 -17.777,-37.869 -16.688,-36.78 C13.1@-13.911,-36.78 -13.01,-36.78 -12.21,-35.98 C14.2@-12.21,-34.781 ; -26.9,-12.4 -17.2,-12.4 -15.81,-11.01 C19.1@-13.911,-11.01 -13.01,-11.01 -12.21,-10.21 C20.2@-12.21,-9.011 ; -26.9,13.37 -17.2,13.37 -15.81,14.76 C25.1@-13.911,14.76 -13.01,14.76 -12.21,15.56 C26.2@-12.21,16.759 ; C18.2@9.26,-17.039 9.26,-15.84 10.06,-15.04 C17.1@10.961,-15.04 12.86,-15.04 14.25,-13.65 23.4,-13.65 23.95,-13.65 ; C12.2@9.266,8.78 C12.2@9.266,8.78 9.265,9.98 10.065,10.78 12.865,10.78 14.255,12.17 23.4,12.17 23.955,12.17 ; C6.2@9.29,46.57 9.29,47.77 10.09,48.57 C5.1@10.94,48.57 10.94,50.849 10.089,51.7 ; C24.2@9.325,-42.82 9.325,-41.62 10.125,-40.82 C23.1@11.026,-40.82 12.925,-40.82 14.315,-39.43 23.2,-39.43 ; FU1.1@47.225,24.9 C2.2@47.225,28.51 C1.1@49.125,30.41
  Top Layer w1: C1.1@49.125,30.41 C1.1@49.125,30.51 49.125,32.41
  Top Layer w2: 21.3,51.7 29.835,51.7 49.125,32.41
  Top Layer w3: X33.1@-57.85,-41.1 X33.2@-57.85,-38.56 X33.3@-57.85,-36.02 X33.4@-57.85,-33.48 X33.5@-57.85,-30.94 X33.6@-57.85,-28.4 X33.7@-57.85,-25.86 X33.8@-57.85,-23.32 X33.9@-57.85,-20.78 X33.10@-57.85,-18.24 X33.11@-57.85,-15.7 X33.12@-57.85,-13.16 X33.13@-57.85,-10.62 X33.14@-57.85,-8.08 X33.15@-57.85,-5.54 X33.16@-57.85,-3 X11.1@-57.85,2.4 X11.2@-57.85,4.94 X11.3@-57.85,7.48 X11.4@-57.85,10.02 X11.5@-57.85,12.56 X11.6@-57.85,15.1 X11.7@-57.85,17.64 X11.8@-57.85,20.18 X11.9@-57.85,22.72 X11.10@-57.85,25.26 X11.11@-57.85,27.8 X11.12@-57.85,30.34 X11.13@-57.85,32.88 X11.14@-57.85,35.42 X11.15@-57.85,37.96 X11.16@-57.85,40.5 -57.85,41.95 -57.3,42.5 ; -57.25,42.45 -53.75,45.95 ; X25.1@-54.35,-41.1 X25.2@-54.35,-38.56 X25.3@-54.35,-36.02 X25.4@-54.35,-33.48 X25.5@-54.35,-30.94 X25.6@-54.35,-28.4 X25.7@-54.35,-25.86 X25.8@-54.35,-23.32 X25.9@-54.35,-20.78 X25.10@-54.35,-18.24 X25.11@-54.35,-15.7 X25.12@-54.35,-13.16 X25.13@-54.35,-10.62 X25.14@-54.35,-8.08 X25.15@-54.35,-5.54 X25.16@-54.35,-3 X19.1@-54.35,2.4 X19.2@-54.35,4.94 X19.3@-54.35,7.48 X19.4@-54.35,10.02 X19.5@-54.35,12.56 X19.6@-54.35,15.1 X19.7@-54.35,17.64 X19.8@-54.35,20.18 X19.9@-54.35,22.72 X19.10@-54.35,25.26 X19.11@-54.35,27.8 X19.12@-54.35,30.34 X19.13@-54.35,32.88 X19.14@-54.35,35.42 X19.15@-54.35,37.96 X19.16@-54.35,40.5 ; -53.75,39.2 -53.75,45.95 ; -27,-63.3 -26.9,-63.2 ; -26.9,-37.7 -26.9,-29.97 -26.9,-12.4 -26.9,-4.2 -26.9,13.37 -26.9,21.57 -26.9,40.7 -24.2,43.4 -16.7,50.9 ; X7.1@-10.972,60.21 -3.745,60.21 C3.1@-3.045,60.91 C4.1@4.205,60.91 4.205,55.705 ; 23.2,-39.43 23.4,-39.23 23.4,-13.65 23.4,12.17 23.4,49.6 21.3,51.7 10.089,51.7 6.084,55.705 4.205,55.705 ; -53.75,45.95 -48.196,51.504 -26.125,51.504 -25.521,50.9 -16.7,50.9 ; -16.7,50.9 -0.6,50.9 4.205,55.705
NetD1_2: D1.2 X3.1 | length 47.6
  Top Layer w0.3: D1.2@7.89,43.45 11.49,43.45 v1(11.54,43.5)
  Top Layer w0.8: v1(12,31.8) 17.6,26.2 v1(19.6,26.2) ; v1(29,29.3) 40.275,29.3 X3.1@40.285,29.31
  Bottom Layer w0.5: v1(11.54,43.5) 11.679,43.361 11.679,41.278 11.54,41.139 11.54,32.26 v1(12,31.8)
  Bottom Layer w0.8: v1(19.6,26.2) 23.5,26.2 26.6,29.3 v1(29,29.3)
NetD1_3: D1.3 D2.3 D3.3 D4.3 D5.3 D6.3 D7.3 D8.3 D9.3 D10.3 D11.3 D12.3 X3.2 X3.3 | length 423.5
  Top Layer w0.3: D12.3@-42.31,-37.12 -40.72,-37.12 v1(-39.66,-38.18) ; D9.3@-42.31,-11.35 -40.72,-11.35 v1(-39.66,-12.41) ; D6.3@-42.31,14.42 -40.72,14.42 v1(-39.66,13.36) ; D3.3@-42.31,40.19 -40.72,40.19 v1(-39.66,39.13) ; v1(-13.46,-55.73) -12.4,-56.79 D2.3@-10.81,-56.79 ; v1(-13.46,-29.96) -12.4,-31.02 D5.3@-10.81,-31.02 ; v1(-13.46,-4.19) -12.4,-5.25 D8.3@-10.81,-5.25 ; v1(-13.46,21.58) -12.4,20.52 D11.3@-10.81,20.52 ; D7.3@7.86,-20.8 9.45,-20.8 v1(10.51,-21.86) ; D4.3@7.865,5.02 9.455,5.02 v1(10.515,3.96) ; D1.3@7.89,42.81 9.48,42.81 v1(10.54,41.75) ; D10.3@7.925,-46.58 9.515,-46.58 10.685,-47.75 v1(10.75,-47.75)
  Top Layer w0.5: X3.3@40.285,24.23 X3.2@40.285,26.77
  Top Layer w0.8: v1(10.7,30.8) 17.1,24.4 v1(19.6,24.4) ; v1(29,26.7) 40.215,26.7 X3.2@40.285,26.77
  Bottom Layer w0.3: v1(-39.66,-38.18) v1@-39.621,-38.141 ; v1(-39.66,39.13) v1@-39.621,39.091 ; v1@-39.621,-12.449 v1(-39.66,-12.41) v1@-39.621,-12.371 ; v1@-39.621,13.321 v1(-39.66,13.36) v1@-39.621,13.399
  Bottom Layer w0.5: v1(-39.66,-38.18) -39.521,-38.319 -39.521,-54.479 -26.8,-67.2 -13.46,-67.2 ; v1@-39.621,-38.141 -39.521,-38.041 -39.521,-12.549 v1@-39.621,-12.449 ; v1@-39.621,-12.371 -39.532,-12.282 -39.532,13.232 v1@-39.621,13.321 ; v1@-39.621,13.399 -39.521,13.499 -39.521,38.991 v1@-39.621,39.091 ; v1(-13.46,21.58) -13.599,21.441 -13.599,-4.051 v1(-13.46,-4.19) -13.599,-4.329 -13.599,-29.821 v1(-13.46,-29.96) -13.599,-30.099 -13.599,-55.591 v1(-13.46,-55.73) -13.46,-67.2 ; v1(10.54,41.75) 10.679,41.611 10.679,29.626 10.664,29.611 10.664,4.109 v1(10.515,3.96) 10.654,3.821 10.654,-21.716 v1(10.51,-21.86) 10.649,-21.999 10.649,-47.649 v1(10.75,-47.75) 10.75,-48.639 10.461,-48.928 10.461,-49.872 10.75,-50.161 10.75,-66.95 8.1,-69.6 -11.8,-69.6 -13.46,-67.94 -13.46,-67.2
  Bottom Layer w0.8: v1(19.6,24.4) 24.23,24.4 26.53,26.7 v1(29,26.7)
NetD1_4: D1.4 D2.4 D3.4 D4.4 D5.4 D6.4 D7.4 D8.4 D9.4 D10.4 D11.4 D12.4 X3.4 | length 424.1
  Top Layer w0.3: D12.4@-42.31,-37.76 -41.558,-37.76 -40.649,-38.669 ; D9.4@-42.31,-11.99 -41.558,-11.99 -40.649,-12.899 ; D6.4@-42.31,13.78 -41.558,13.78 -40.671,12.893 v1(-40.671,11.877) ; D3.4@-42.31,39.55 -41.558,39.55 -40.649,38.641 ; v1(-40.66,-39.93) -40.66,-38.68 ; v1(-40.66,-14) -40.66,-12.91 ; v1(-40.66,37.38) -40.66,38.63 ; -12.471,-55.241 -11.562,-56.15 D2.4@-10.81,-56.15 ; -12.471,-29.471 -11.562,-30.38 D5.4@-10.81,-30.38 ; -12.471,-3.701 -11.562,-4.61 D8.4@-10.81,-4.61 ; -12.471,22.069 -11.562,21.16 D11.4@-10.81,21.16 ; -12.46,-55.23 v1(-12.46,-53.98) ; -12.46,-29.46 v1(-12.46,-28.21) ; -12.46,-3.69 v1(-12.46,-2.44) ; -12.46,22.08 v1(-12.46,23.33) ; D7.4@7.86,-21.44 8.612,-21.44 9.521,-22.349 ; D4.4@7.865,4.38 8.617,4.38 9.526,3.471 ; D1.4@7.89,42.17 8.642,42.17 9.551,41.261 9.54,41.25 v1(9.54,40) ; D10.4@7.925,-47.22 8.677,-47.22 9.586,-48.129 ; v1(9.51,-23.61) 9.51,-22.36 ; v1(9.515,2.21) 9.515,3.46 ; v1(9.564,-50.586) 9.564,-48.151 9.575,-48.14
  Top Layer w0.5: v1(-14.7,-68.7) -11.5,-68.7 v1(-11,-68.2)
  Top Layer w0.8: v1(9.3,28.4) 9.4,28.4 16.2,21.6 v1(19.6,21.6) ; v1(29,21.6) 39.975,21.6 40.175,21.8 X3.4@40.285,21.69
  Bottom Layer w0.5: v1(-40.671,11.877) v1@-40.799,11.749 ; -40.66,-55.07 -40.66,-55.04 ; v1(-40.66,37.38) -40.799,37.241 v1@-40.799,11.749 ; v1(-14.7,-68.7) -14.8,-68.8 -26.9,-68.8 -40.66,-55.04 ; v1(-12.46,23.33) -12.321,23.191 -12.321,-2.301 v1(-12.46,-2.44) -12.321,-2.579 -12.321,-28.071 v1(-12.46,-28.21) -12.321,-28.349 -12.321,-53.841 v1(-12.46,-53.98) -12.321,-54.119 -12.321,-67.321 -11.142,-68.5 7.6,-68.5 9.575,-66.525 9.564,-66.514 v1(9.564,-50.586) 9.51,-50.532 v1(9.51,-23.61) 9.371,-23.471 9.371,2.066 v1(9.515,2.21) 9.376,2.349 9.376,39.836 v1(9.54,40) ; v1@-40.799,11.749 -40.799,-14.021 -40.778,-14 v1(-40.66,-14) -40.799,-14.139 -40.799,-39.791 v1(-40.66,-39.93) -40.66,-55.04
  Bottom Layer w0.8: v1(19.6,21.6) v1(29,21.6) ; X3.4@40.045,21.45 X3.4@40.285,21.69
NetD1_5: D1.5 X9.1 | length 9.2
  Top Layer w0.3: X9.1@1.13,46.61 3.84,43.9 3.84,43.32 5.63,41.53 D1.5@7.89,41.53
NetD1_6: D1.6 X9.2 | length 8.1
  Top Layer w0.3: X9.2@1.13,44.07 2.09,44.07 5.27,40.89 D1.6@7.89,40.89
NetD1_7: D1.7 X9.3 | length 7.3
  Top Layer w0.3: X9.3@1.13,41.53 3.63,41.53 4.91,40.25 D1.7@7.89,40.25
NetD1_8: D1.8 X9.4 | length 7
  Top Layer w0.3: X9.4@1.13,38.99 4.26,38.99 4.88,39.61 D1.8@7.89,39.61
NetD1_9: D1.9 X9.5 | length 7.8
  Top Layer w0.3: X9.5@1.13,36.45 2.72,36.45 5.24,38.97 D1.9@7.89,38.97
NetD1_10: D1.10 X9.6 | length 8.6
  Top Layer w0.3: X9.6@1.13,33.91 1.43,33.91 5.85,38.33 D1.10@7.89,38.33
NetD1_11: D1.11 X9.7 | length 10.6
  Top Layer w0.3: X9.7@1.13,31.86 X9.7@1.13,31.37 1.39,31.37 2.84,32.82 2.84,34.07 6.46,37.69 D1.11@7.89,37.69
NetD1_12: D1.12 X9.8 | length 11.5
  Top Layer w0.3: X9.8@1.13,28.83 3.59,31.29 3.59,33.57 7.07,37.05 D1.12@7.89,37.05
NetD1_13: D1.13 X13.1 | length 11
  Top Layer w0.3: D1.13@13.29,37.05 14.11,37.05 15.59,35.57 15.59,32.04 X13.1@18.8,28.83
NetD1_14: D1.14 X13.2 | length 9.4
  Top Layer w0.3: D1.14@13.29,37.69 14.72,37.69 16.59,35.82 16.59,33.58 X13.2@18.8,31.37
NetD1_15: D1.15 X13.3 | length 7.9
  Top Layer w0.3: D1.15@13.29,38.33 15.33,38.33 17.34,36.32 17.34,35.37 X13.3@18.8,33.91
NetD1_16: D1.16 X13.4 | length 6.6
  Top Layer w0.3: D1.16@13.29,38.97 15.94,38.97 18.46,36.45 X13.4@18.8,36.45
NetD1_17: D1.17 X13.5 | length 5.8
  Top Layer w0.3: D1.17@13.29,39.61 16.55,39.61 17.17,38.99 X13.5@18.8,38.99
NetD1_18: D1.18 X13.6 | length 6
  Top Layer w0.3: D1.18@13.29,40.25 16.52,40.25 17.8,41.53 X13.6@18.8,41.53
NetD1_19: D1.19 X13.7 | length 7
  Top Layer w0.3: D1.19@13.29,40.89 15.91,40.89 18.8,43.78 X13.7@18.8,44.07
NetD1_20: D1.20 X13.8 | length 8.5
  Top Layer w0.3: D1.20@13.29,41.53 15.3,41.53 17.09,43.32 17.09,44.9 X13.8@18.8,46.61
NetD1_22: D1.22 D4.2 | length 42.5
  Top Layer w0.3: D4.2@7.865,5.66 6.786,5.66 5.586,6.86 5.595,6.869 5.595,20.42 5.61,20.435 5.61,32.42 9.54,36.35 9.54,38.5 11.79,40.75 11.79,42.25 12.35,42.81 D1.22@13.29,42.81
NetD1_23: D1.23 R1.1 | length 2.3
  Top Layer w0.3: D1.23@13.29,43.45 14.67,43.45 R1.1@15.34,44.12
NetD2_2: D2.2 D10.22 | length 35.9
  Top Layer w0.3: D2.2@-10.81,-57.43 -9.37,-57.43 -4.8,-62 2.7,-62 11.6,-53.1 v1(11.6,-49.4) 11.8,-49.2 11.8,-46.9 12.12,-46.58 D10.22@13.325,-46.58
NetD2_5: D2.5 X10.1 | length 9.2
  Top Layer w0.3: D2.5@-10.81,-55.51 -8.55,-55.51 -6.76,-57.3 -6.76,-57.88 X10.1@-4.05,-60.59
NetD2_6: D2.6 X10.2 | length 8.1
  Top Layer w0.3: D2.6@-10.81,-54.87 -8.19,-54.87 -5.01,-58.05 X10.2@-4.05,-58.05
NetD2_7: D2.7 X10.3 | length 7.3
  Top Layer w0.3: D2.7@-10.81,-54.23 -7.83,-54.23 -6.55,-55.51 X10.3@-4.05,-55.51
NetD2_8: D2.8 X10.4 | length 7
  Top Layer w0.3: D2.8@-10.81,-53.59 -7.8,-53.59 -7.18,-52.97 X10.4@-4.05,-52.97
NetD2_9: D2.9 X10.5 | length 7.8
  Top Layer w0.3: D2.9@-10.81,-52.95 -8.16,-52.95 -5.64,-50.43 X10.5@-4.05,-50.43
NetD2_10: D2.10 X10.6 | length 8.3
  Top Layer w0.3: D2.10@-10.81,-52.31 -8.77,-52.31 X10.6@-4.35,-47.89
NetD2_11: D2.11 X10.7 | length 9.9
  Top Layer w0.3: D2.11@-10.81,-51.67 -9.38,-51.67 -5.76,-48.05 -5.76,-46.8 X10.7@-4.31,-45.35
NetD2_12: D2.12 X10.8 | length 11.5
  Top Layer w0.3: D2.12@-10.81,-51.03 -9.99,-51.03 -6.51,-47.55 -6.51,-45.27 X10.8@-4.05,-42.81
NetD2_13: D2.13 X14.1 | length 11
  Top Layer w0.3: X14.1@-21.72,-42.81 -18.51,-46.02 -18.51,-49.55 -17.03,-51.03 D2.13@-16.21,-51.03
NetD2_14: D2.14 X14.2 | length 9.4
  Top Layer w0.3: X14.2@-21.72,-45.35 -19.51,-47.56 -19.51,-49.8 -17.64,-51.67 D2.14@-16.21,-51.67
NetD2_15: D2.15 X14.3 | length 7.9
  Top Layer w0.3: X14.3@-21.72,-47.89 -20.26,-49.35 -20.26,-50.3 -18.25,-52.31 D2.15@-16.21,-52.31
NetD2_16: D2.16 X14.4 | length 6.2
  Top Layer w0.3: X14.4@-21.38,-50.43 -18.86,-52.95 D2.16@-16.21,-52.95
NetD2_17: D2.17 X14.5 | length 5.8
  Top Layer w0.3: X14.5@-21.72,-52.97 -20.09,-52.97 -19.47,-53.59 D2.17@-16.21,-53.59
NetD2_18: D2.18 X14.6 | length 6
  Top Layer w0.3: X14.6@-21.72,-55.51 -20.72,-55.51 -19.44,-54.23 D2.18@-16.21,-54.23
NetD2_19: D2.19 X14.7 | length 6.7
  Top Layer w0.3: X14.7@-21.72,-57.76 -18.83,-54.87 D2.19@-16.21,-54.87
NetD2_20: D2.20 X14.8 | length 8.5
  Top Layer w0.3: X14.8@-21.72,-60.59 -20.01,-58.88 -20.01,-57.3 -18.22,-55.51 D2.20@-16.21,-55.51
NetD2_22: D2.22 D5.2 | length 30.6
  Top Layer w0.3: D2.22@-16.21,-56.79 -15.075,-56.79 -14.65,-56.365 -14.65,-54.15 -12.4,-51.9 -12.4,-49.75 -8.47,-45.82 -8.47,-32.921 -9.731,-31.66 D5.2@-10.81,-31.66
NetD2_23: D2.23 R2.1 | length 2.4
  Top Layer w0.3: R2.1@-18.311,-58.151 -17.59,-57.43 D2.23@-16.21,-57.43
NetD3_2: D3.2 D11.22 | length 66.1
  Top Layer w0.3: v1@-38.71,40.83 v1(-39.01,40.83) D3.2@-42.31,40.83 -42.376,40.896 -43.128,40.896 -44.51,42.278 -44.51,49.08 -43.99,49.6 -27.71,49.6 -27,48.89 v1(-27,49) ; v1(-20.5,42.4) -14.71,36.61 -14.71,21.08 -15.27,20.52 D11.22@-16.21,20.52
  Bottom Layer w0.3: v1(-27,49) -27,48.9 v1(-20.5,42.4)
NetD3_5: D3.5 X12.1 | length 9.2
  Top Layer w0.3: X12.1@-49.07,43.99 -46.36,41.28 -46.36,40.7 -44.57,38.91 D3.5@-42.31,38.91
NetD3_6: D3.6 X12.2 | length 8.1
  Top Layer w0.3: X12.2@-49.07,41.45 -48.11,41.45 -44.93,38.27 D3.6@-42.31,38.27
NetD3_7: D3.7 X12.3 | length 7.3
  Top Layer w0.3: X12.3@-49.07,38.91 -46.57,38.91 -45.29,37.63 D3.7@-42.31,37.63
NetD3_8: D3.8 X12.4 | length 7
  Top Layer w0.3: X12.4@-49.07,36.37 -45.94,36.37 -45.32,36.99 D3.8@-42.31,36.99
NetD3_9: D3.9 X12.5 | length 7.8
  Top Layer w0.3: X12.5@-49.07,33.83 -47.48,33.83 -44.96,36.35 D3.9@-42.31,36.35
NetD3_10: D3.10 X12.6 | length 8.3
  Top Layer w0.3: X12.6@-48.77,31.29 -44.35,35.71 D3.10@-42.31,35.71
NetD3_11: D3.11 X12.7 | length 9.9
  Top Layer w0.3: X12.7@-48.81,28.75 -47.36,30.2 -47.36,31.45 -43.74,35.07 D3.11@-42.31,35.07
NetD3_12: D3.12 X12.8 | length 11.5
  Top Layer w0.3: X12.8@-49.07,26.21 -46.61,28.67 -46.61,30.95 -43.13,34.43 D3.12@-42.31,34.43
NetD3_13: D3.13 X15.1 | length 11
  Top Layer w0.3: D3.13@-36.91,34.43 -36.09,34.43 -34.61,32.95 -34.61,29.42 X15.1@-31.4,26.21
NetD3_14: D3.14 X15.2 | length 9.4
  Top Layer w0.3: D3.14@-36.91,35.07 -35.48,35.07 -33.61,33.2 -33.61,30.96 X15.2@-31.4,28.75
NetD3_15: D3.15 X15.3 | length 7.9
  Top Layer w0.3: D3.15@-36.91,35.71 -34.87,35.71 -32.86,33.7 -32.86,32.75 X15.3@-31.4,31.29
NetD3_16: D3.16 X15.4 | length 6.2
  Top Layer w0.3: D3.16@-36.91,36.35 -34.26,36.35 X15.4@-31.74,33.83
NetD3_17: D3.17 X15.5 | length 5.8
  Top Layer w0.3: D3.17@-36.91,36.99 -33.65,36.99 -33.03,36.37 X15.5@-31.4,36.37
NetD3_18: D3.18 X15.6 | length 6
  Top Layer w0.3: D3.18@-36.91,37.63 -33.68,37.63 -32.4,38.91 X15.6@-31.4,38.91
NetD3_19: D3.19 X15.7 | length 6.7
  Top Layer w0.3: D3.19@-36.91,38.27 -34.29,38.27 X15.7@-31.4,41.16
NetD3_20: D3.20 X15.8 | length 8.5
  Top Layer w0.3: D3.20@-36.91,38.91 -34.9,38.91 -33.11,40.7 -33.11,42.28 X15.8@-31.4,43.99
NetD3_22: D3.22 D6.2 | length 30.6
  Top Layer w0.3: D6.2@-42.31,15.06 -43.389,15.06 -44.65,16.321 -44.65,29.22 -40.72,33.15 -40.72,35.3 -38.47,37.55 -38.47,39.765 -38.045,40.19 D3.22@-36.91,40.19
NetD3_23: D3.23 R3.1 | length 2.4
  Top Layer w0.3: D3.23@-36.91,40.83 -35.53,40.83 R3.1@-34.809,41.551
NetD4_5: D4.5 X16.1 | length 9.2
  Top Layer w0.3: X16.1@1.105,8.82 3.815,6.11 3.815,5.53 5.605,3.74 D4.5@7.865,3.74
NetD4_6: D4.6 X16.2 | length 8.1
  Top Layer w0.3: X16.2@1.105,6.28 2.065,6.28 5.245,3.1 D4.6@7.865,3.1
NetD4_7: D4.7 X16.3 | length 7.3
  Top Layer w0.3: X16.3@1.105,3.74 3.605,3.74 4.885,2.46 D4.7@7.865,2.46
NetD4_8: D4.8 X16.4 | length 7
  Top Layer w0.3: X16.4@1.105,1.2 4.235,1.2 4.855,1.82 D4.8@7.865,1.82